# Altium PCB SGK_DVR_01.PcbDoc (part 6 of 7)
Units mil, origin at the board's own origin, x right, y up, seen from the top; angles counter-clockwise.
Board outline 3070.87 x 2598.47 mil, 6 copper layers (Top, L2 GND, l3 POWER, L4 SIG, L5 GND, Bottom), stack 58.1 mil thick; 475 components, 339 nets, 1964 pads, 1036 vias.
Unrouted connection lines stored in the file: 522.
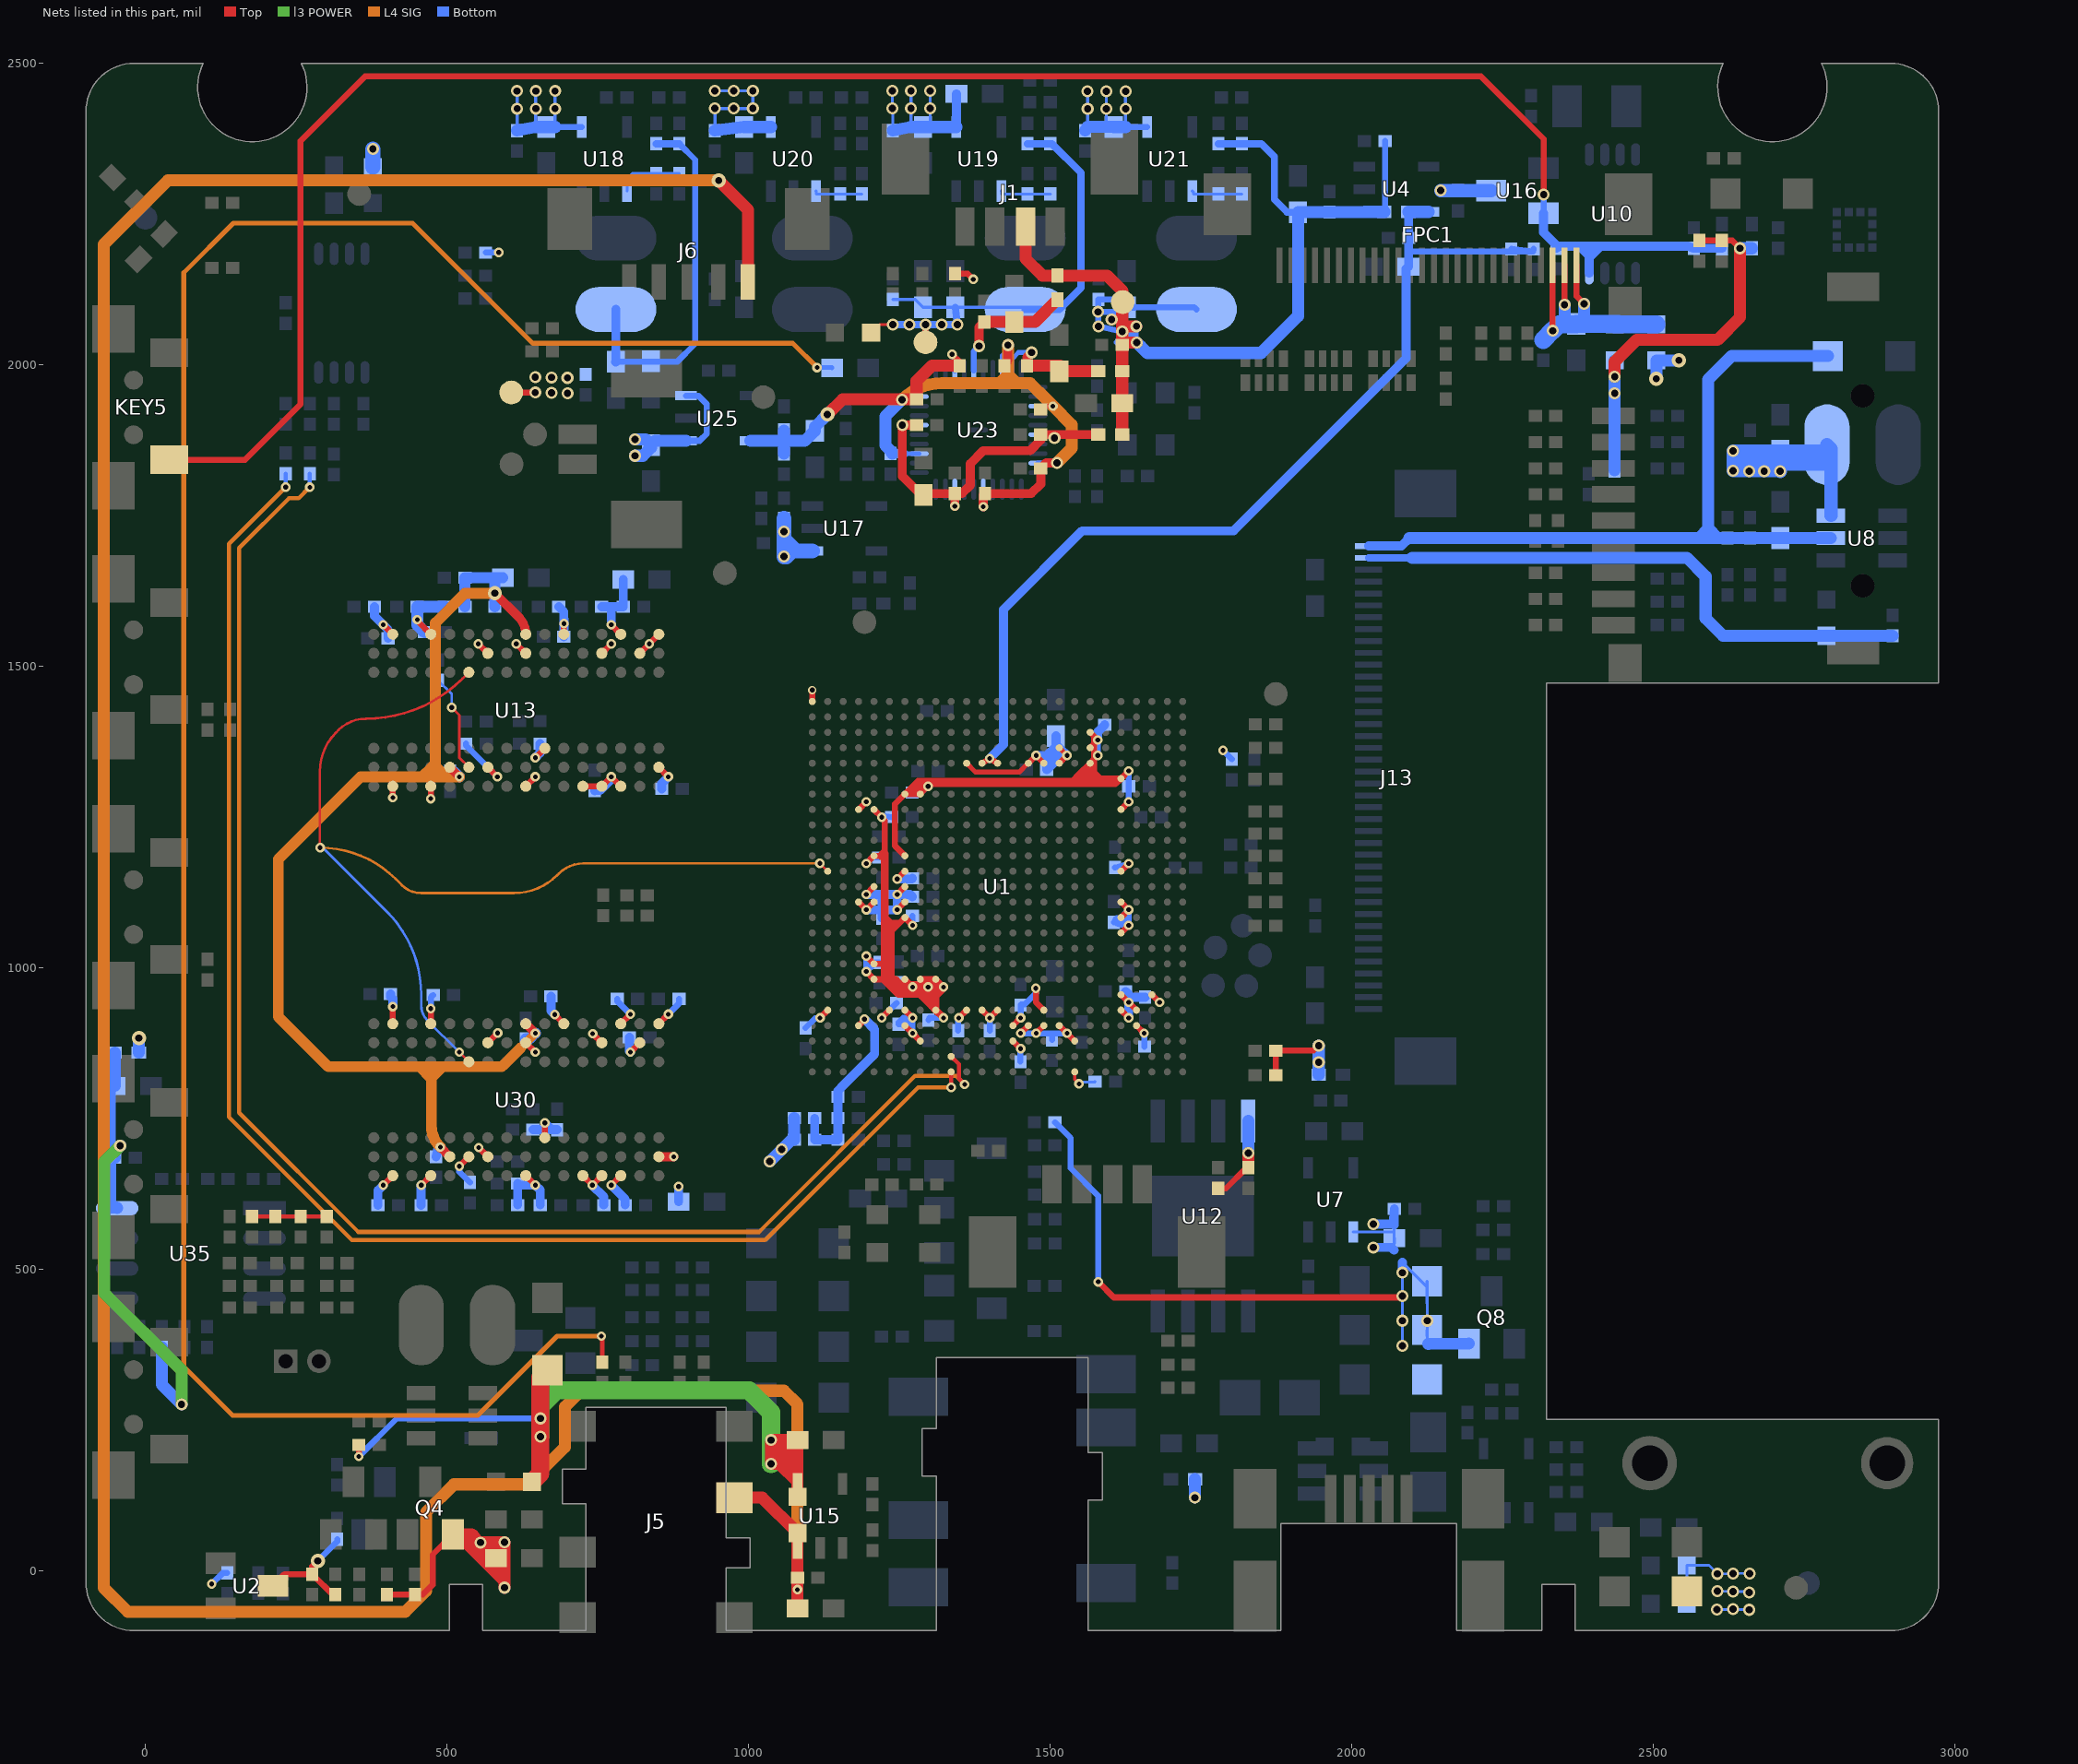
[diagram p8: the nets of this part, all layers, seen from the top]

## Via types
v1: diameter 15.75, hole 7.87, Top to Bottom, 800 vias
v2: diameter 20, hole 12, Top to Bottom, 204 vias
v3: diameter 23.62, hole 11.81, Top to Bottom, 31 vias
v4: diameter 14, hole 8, Top to Bottom, 1 vias

## Nets (pads, with @x,y where several pads share a name; then routed paths per layer and width w, separated by ;. In a path a pad name is that pad's centre, name@x,y a point inside that pad or via, vN(x,y) a via of type N, cw(c..) or ccw(c..) an arc to the next point about the centre after c; other vN are vias at no path point) (continued)
VBUS: C76.2 C88.2 C98.2 C99.1 C133.2 C135.2 C152.2 C158.1 C159.1 C164.1 C165.1 C170.1 C171.1 C174.1 C175.1 C194.1 D6.2 D7.2 D8.2 D14.2 FB8.2 L1.2 L3.2 Q4.2 Q8.2 R37.1 R111.2 R116.1 R129.1 R138.1 U7.1 U8.6 U16.3 U18.4 U19.4 U20.4 U21.4 | length 4583.7
  Top w10: R111.2@400.53,-38.94 C135.2@446.68,-38.94 459.64,-38.94 476.33,-22.25 476.33,27.87 Q4.2@509.61,61.15 ; v1(1579.34,479.79) 1605.14,453.99 2083.55,453.99 v2(2083.55,456.18)
  Top w20: Q4.2@509.61,61.15 Q4.2@517.3,61.15 ; v2@553.96,48.42 554.64,47.56 555.37,46.63 555.59,46.36 C133.2@564.37,35.28 ; C133.2@580.74,21.63 C133.2@579.78,22.63 ; v2(595.19,-27.23) 595.19,-16.74 ; Q4.2@517.3,61.15 529.05,61.15 ; Q4.2@517.3,61.15 595.19,-16.74 ; 529.05,61.15 543.92,46.28 ; 529.05,61.15 541.22,61.15 551.84,48.42 552.56,47.56 553.33,46.63 553.56,46.36 562.8,35.28 566.3,31.08 567.22,29.98 573.35,22.63 574.18,21.63 573.46,22.63 568.18,29.98 567.39,31.08 C133.2@564.37,35.28 ; 543.92,46.28 545.54,47.91 v2(595.19,47.91) ; 543.92,46.28 595.19,-4.99 595.19,-16.74 ; v2(555.55,47.56) 556.45,46.63 v2@556.71,46.36 ; v2(555.55,47.56) 556.21,46.63 556.41,46.36 C133.2@564.37,35.28 ; v2(555.55,47.56) 556.25,46.63 556.46,46.36 564.85,35.28 568.03,31.08 568.87,29.98 C133.2@574.44,22.63 ; v2(555.55,47.56) 556.43,46.63 v2@556.7,46.36 ; v2@556.71,46.36 567.48,35.28 571.56,31.08 572.63,29.98 C133.2@574.89,27.65 ; v2@556.7,46.36 567.29,35.28 571.31,31.08 572.37,29.98 579.4,22.63 580.36,21.63 C133.2@579.78,22.63 ; C133.2@564.37,35.28 567.7,31.08 568.57,29.98 C133.2@574.4,22.63 ; C133.2@574.4,22.63 575.19,21.63 C133.2@574.44,22.63 ; C133.2@574.89,27.65 C133.2@579.78,22.63 ; C133.2@574.89,27.65 v2(595.19,47.91) ; 595.19,-16.74 v2(595.19,47.91)
  Bottom w4.2: R129.1@2555.13,-54.26 R138.1@2555.13,9.67 2591.83,9.67 v2(2605.77,-4.27) 2630.88,-4.27 v2(2631.48,-3.67) 2658.54,-3.67 v2(2659.02,-4.15) ; v2(2604.95,-63.6) v2@2630.92,-63.6 ; v2(2605.77,-33.22) 2630.98,-33.22 v2(2631.66,-33.9) 2656.9,-33.9 v2(2658.31,-35.31) ; v2(2631.66,-62.85) v2@2630.92,-63.6 ; v2(2658.31,-63.96) 2657.95,-63.6 v2@2630.92,-63.6
  Bottom w5: C159.1@615.94,2388.57 616.17,2394.84 v2(616.17,2425.01) 616.17,2454.13 v2(616.04,2454.26) ; 647.01,2394.59 v2(647.01,2425.01) v2(647.01,2454.26) ; C158.1@679.01,2394.59 v2(679.01,2425.01) v2(679.01,2454.26) ; v2(943.93,2454.5) v2(974.9,2454.5) v2(1006.9,2454.5) v2(1006.9,2425.25) v2(974.9,2425.25) v2(944.06,2425.25) 944.06,2394.59 C171.1@944.06,2388.57 ; v2(1238,2454.79) 1238.13,2454.66 v2(1238.13,2425.54) 1238.95,2424.72 C165.1@1238.95,2388.57 ; 1268.97,2394.59 v2(1268.97,2425.54) v2(1268.97,2454.79) ; C164.1@1300.97,2394.59 v2(1300.97,2425.54) v2(1300.97,2454.79) ; v2(1561.74,2453.98) 1561.87,2453.85 v2(1561.87,2424.73) C175.1@1561.87,2394.75 ; C174.1@1592.71,2394.64 v2(1592.71,2424.73) v2(1592.71,2453.98) ; 1624.71,2394.59 v2(1624.71,2424.73) v2(1624.71,2453.98) ; U7.1@2002.29,562.55 C88.2@2069.94,562.55 ; 2069.94,574.19 C88.2@2069.94,562.55 ; C88.2@2070.43,552.14 2069.94,532.39 C88.2@2069.94,562.55 ; v2(2083.55,373.61) v2(2083.55,415.36) v2(2083.55,456.18) v2(2083.55,494.99) ; 2083.55,512.28 D7.2@2124.42,471.42 ; D6.2@2124.36,399.86 D6.2@2124.77,377.01 ; D6.2@2126.81,377.01 D6.2@2124.77,377.01 ; D7.2@2124.42,471.42 2124.77,471.07 2124.42,479.45 D7.2@2124.36,480.86 D7.2@2124.42,471.42 ; D7.2@2124.42,471.42 v2(2124.77,415.36) D6.2@2124.77,377.01
  Bottom w10: C158.1@679.01,2394.59 U18.4@723.3,2394.59 ; R116.1@1507.52,744.33 1533.55,718.3 1533.55,668.36 1579.6,622.31 1579.6,480.06 v1(1579.34,479.79) ; 1624.71,2394.59 U21.4@1660.68,2394.59
  Bottom w15: U19.4@1343.95,2394.59 1344.34,2394.98 C194.1@1344.34,2449.45 ; v2(2035.6,536.82) 2065.51,536.82 2069.94,532.39 ; v2(2035.6,575.63) 2068.51,575.63 C76.2@2070.26,600.61 2069.94,574.19 ; v2(2083.55,494.99) 2083.55,512.28
  Bottom w20: C159.1@615.94,2388.57 647.01,2394.59 C158.1@664.63,2394.59 C158.1@679.01,2394.59 ; C171.1@944.06,2388.57 C170.1@992.35,2394.59 U20.4@1036.89,2394.59 ; C165.1@1238.95,2388.57 1268.97,2394.59 C164.1@1288.74,2394.59 1300.97,2394.59 U19.4@1343.95,2394.59 ; C175.1@1557.87,2388.57 1561.87,2394.75 1592.71,2394.64 C174.1@1604.98,2394.59 1624.71,2394.59 ; v2(1739.68,121.9) L3.2@1739.88,152.34 ; D6.2@2126.81,377.01 Q8.2@2193.93,377.28 ; v3(2504.55,1977.2) R37.1@2504.55,2007.55 v3(2541.97,2007.55)
  Bottom w22: v2(2147.07,2289.22) C152.2@2175.67,2289.22 U16.3@2230.55,2289.22 ; C99.1@2659.8,1857.5 2679.36,1857.5 ; U8.6@2794.07,1750.42 L1.2@2794.07,1835.71 ; 2631.79,1842.38 v2(2631.79,1824.58) 2709,1824.58 v2(2709.83,1823.75) 2709.83,1835.71 ; 2631.79,1842.38 C98.2@2709.68,1842.38 ; 2631.79,1842.38 v2(2631.79,1857.5) 2679.36,1857.5 ; 2679.36,1857.5 C98.2@2709.83,1857.5 ; C98.2@2709.68,1842.38 2709.83,1842.23 2709.83,1835.71 ; C98.2@2709.68,1842.38 2709.83,1842.38 C98.2@2709.83,1857.5 ; 2709.83,1835.71 2787.45,1835.71 L1.2@2794.07,1835.71 ; C98.2@2709.83,1857.5 2782.74,1857.5 2787.45,1862.2 L1.2@2787.45,1867.83 2794.07,1861.2 L1.2@2794.07,1835.71
  Bottom w25: v2(377.05,2357.97) 377.22,2357.8 FB8.2@377.22,2328.17
  other v2: 2658.5,1823.75 2683.25,1823.75
VCC_5V: C134.2 D2.2 R105.1 R110.2 R117.2 U15.5 | length 1438.7
  Top w10: v1(353.72,190.15) R110.2@353.72,209.25
  Top w20: R117.2@1080.88,123.3 U15.5@1080.88,144.72 U15.5@1080.88,148.47 ; v2@1037.06,187.36 v2(1037.06,177.85) 1051.51,177.85 ; v2@1037.06,187.36 1037.06,200.51 ; v2@1037.06,187.36 1080.88,187.36 ; 1037.06,200.51 v2(1037.06,217.46) C134.2@1079.31,217.46 ; 1037.06,200.51 1080.88,200.51 ; 1051.51,177.85 1080.88,177.85 ; 1051.51,177.85 U15.5@1080.88,148.47 ; C134.2@1079.31,217.46 C134.2@1080.69,217.46 1080.88,217.27 C134.2@1080.88,215.89 ; C134.2@1079.31,217.46 C134.2@1080.88,215.89 ; U15.5@1080.88,148.47 1080.88,177.85 ; 1080.88,177.85 1080.88,187.36 ; 1080.88,187.36 1080.88,200.51 ; 1080.88,200.51 C134.2@1080.88,215.89
  Top w30: R105.1@640.87,148.15 654.63,161.91 v2(654.63,223.26) v2(654.63,253.28) 654.63,321.29 D2.2@666.43,333.08
  l3 POWER w30: v2(654.63,223.26) v2(654.63,253.28) 654.63,273.79 680.69,299.84 1000.47,299.84 1037.06,263.26 v2(1037.06,217.46) v2(1037.06,177.85)
  Bottom w10: v1(353.72,190.15) 416.85,253.28 v2(654.63,253.28)
VCC_CAM: C138.2 C139.2 J5.2 J6.1 R117.1 U15.1 | length 5483
  Top w20: v3(950.44,2305.8) 998.65,2257.59 J6.1@998.65,2137.8 ; J5.2@976.38,122.05 1022.43,122.05 1080.88,63.6 R117.1@1080.88,63.3 U15.1@1080.88,38.42 C139.2@1080.88,-11.06 v1(1080.88,-30.47) C138.2@1080.88,-61.56
  L4 SIG w20: v3(950.44,2305.8) 950.13,2306.11 37.12,2306.11 -68.81,2200.18 -68.81,-27.82 -29.25,-67.38 430.58,-67.38 465.16,-32.8 465.16,97.74 511.38,143.95 633.51,143.95 695.35,205.79 695.35,272.4 722.1,299.15 1058.48,299.15 1080.88,276.75 v1(1080.88,-30.47)
VCC_RTC: C115.1 C145.2 FB11.1 KEY5.1 U10.8 U16.2 | length 3402
  Top w10: KEY5.1@39.37,1842.91 165.15,1842.91 257.16,1934.93 257.16,2371.44 364.36,2478.63 2213.7,2478.63 2317.79,2374.54 v2(2317.79,2282.64)
  Bottom w10: U16.2@2317.55,2251.72 2317.79,2251.96 v2(2317.79,2282.64) ; C115.1@2338.87,2193.49 C115.1@2338.87,2198.7
  Bottom w15: U16.2@2317.55,2251.72 2317.55,2220.02 C115.1@2338.87,2198.7 ; C115.1@2338.87,2193.49 2340.06,2194.68 2340.06,2197.12 2377.17,2197.12 ; U10.8@2393.42,2152.14 2393.42,2180.87 ; FB11.1@2613.12,2193.49 C145.2@2566.59,2193.49 2556.05,2197.12 2412.4,2197.12 ; 2377.17,2197.12 2393.42,2197.12 ; 2377.17,2197.12 2393.42,2180.87 ; 2393.42,2180.87 2396.15,2180.87 2412.4,2197.12 ; 2393.42,2180.87 2393.42,2197.12 ; 2393.42,2197.12 2412.4,2197.12
VCC_SENSOR: C71.2 C72.2 FPC1.1 FPC1.2 FPC1.3 R30.2 R37.2 | length 514
  Top w10: v2(2332.68,2056.73) 2332.68,2100.09 FPC1.3@2332.68,2165.35 ; v2(2352.36,2100.09) FPC1.2@2352.36,2165.35 ; FPC1.1@2372.05,2165.35 2372.05,2114.17 v2(2384.6,2101.62)
  Bottom w20: 2352.36,2067.53 v2(2352.36,2100.09) ; C72.2@2384.6,2067.97 v2(2384.6,2101.62)
  Bottom w30: C71.2@2317.16,2041.58 v2@2332.31,2056.73 ; v2(2332.68,2056.73) v2@2332.31,2056.73 ; R30.2@2435.52,2067.55 R30.2@2441.65,2067.55 ; R37.2@2504.55,2067.55 2490.58,2067.55 R30.2@2441.65,2067.55 ; v2@2332.31,2056.73 2332.68,2057.1 2343.11,2067.53 2352.36,2067.53 2371.32,2067.53 C72.2@2371.76,2067.97 2384.6,2067.97 2435.52,2067.97 2441.23,2067.97 R30.2@2441.65,2067.55
VCCA: C132.2 C137.2 FB4.2 R101.1 U35.8 | length 909.8
  l3 POWER w20: v2(-41.94,705.26) -68.42,678.79 -68.42,461.62 59.81,333.39 v2(59.81,276.55)
  Bottom w20: C137.2@-50.93,685.71 C137.2@-58.29,687.92 ; FB4.2@-50.93,859.73 C132.2@-50.93,804.64 -58.9,804.64 -58.9,688.11 -58.29,688.11 C137.2@-58.29,687.92 ; U35.8@-46.84,601.99 -47.88,603.03 -58.29,603.03 C137.2@-58.29,687.92 ; v2(-41.94,705.26) -50.93,695.73 C137.2@-58.29,687.92 ; R101.1@26.93,371.3 26.93,309.43 v2(59.81,276.55)
VDD11: C18.2 C19.2 C20.2 C21.2 C22.2 C23.2 C24.2 C25.2 C26.2 C27.2 C57.2 C161.1 C162.1 C163.1 C195.1 L10.2 R146.2 R187.1 TP1.1 U1.AA8 U1.AA11 U1.AA18 U1.AA19 U1.D21 U1.E20 U1.E21 U1.J4 U1.J5 U1.K5 U1.K21 U1.L5 U1.M22 U1.R5 U1.U19 U1.U21 U1.V19 U1.W15 U1.W19 | length 2767
  Top w4.4: R146.2@1202.96,2053.45 1216.53,2067.02 v2(1238.88,2067.02)
  Top w5: 1279.75,968.67 1279.75,968.01 1290.29,957.47
  Top w8: U1.R5@1361.25,1339.73 1376.04,1324.94 1448.5,1324.94 1463.29,1339.73 U1.L5@1463.61,1339.73 ; U1.J4@1514.79,1365.33 v1(1527.58,1352.53)
  Top w10: v1(1194.91,994.26) U1.AA19@1207.71,981.47 1225.53,981.47 1225.78,981.47 1231.76,987.45 ; v1(1194.91,1019.85) U1.AA18@1207.71,1007.06 1225.53,1007.06 1231.76,1007.06 ; v1(1194.91,1173.39) U1.AA11@1207.71,1186.19 1216.79,1186.19 ; U1.AA8@1207.71,1262.96 v1(1220.5,1250.17) 1225.53,1245.14 1225.53,1194.93 ; 1225.53,1085.44 1233.17,1077.8 1235.76,1075.21 ; 1225.53,1178.28 1217.62,1186.19 ; 1225.53,1186.19 1217.62,1186.19 ; 1225.53,1189.45 1225.53,1194.93 ; 1228.12,1075.21 1235.76,1075.21 ; 1231.76,1057.98 1233.03,1057.98 1246.62,1071.57 1250.26,1075.21 ; U1.W19@1258.89,981.47 v1(1271.68,968.67) ; v1(1271.68,1071.03) U1.W15@1258.89,1083.83 1250.26,1075.21 ; v2(1292.94,2067.02) 1293.06,2066.9 1293.06,2037.87 TP1.1@1293.06,2037.62 ; v1(1297.27,968.67) U1.V19@1284.48,981.47 1300.75,981.47 ; 1310.06,968.67 1310.06,972.16 1300.75,981.47 ; v1(1322.86,968.67) U1.U19@1310.07,981.47 1300.75,981.47 ; U1.M22@1438.02,904.69 v1(1450.81,917.49) ; U1.L5@1463.61,1339.73 v1(1476.4,1352.53) U1.K5@1489.2,1339.73 ; v1(1475.95,966.63) 1475.95,943.53 U1.K21@1489.2,930.29 ; U1.J5@1514.79,1339.73 v1(1527.58,1352.53) ; U1.E21@1617.15,930.29 v1(1629.94,917.49) ; U1.E20@1617.15,955.88 v1(1629.94,943.08) U1.D21@1642.74,930.29 ; 1216.79,1186.19 1217.62,1186.19 ; 1216.79,1186.19 1217.26,1186.66 ; 1217.26,1186.66 1217.26,1186.55 1217.62,1186.19 ; 1217.26,1186.66 1220.05,1189.45 1225.53,1194.93 ; 1235.76,1075.21 1250.26,1075.21
  Top w12: v1@1272.65,968.67 1272.65,967.7 1282.88,957.47 ; 1310.06,968.67 1310.06,957.47 ; v1(1322.86,917.49) U1.U21@1310.07,930.29 ; v1(1322.86,968.67) 1322.86,966.68 1313.65,957.47 1310.06,953.88 ; 1282.88,957.47 1290.29,957.47 1303.05,957.47 ; 1282.88,957.47 1286.47,953.88 1290.58,949.76 ; 1290.58,949.76 1295.34,949.76 1299.46,953.88 1303.05,957.47 ; 1290.58,949.76 1303.05,937.3 ; 1303.05,937.3 1303.05,949.76 1303.05,953.88 1303.05,957.47 ; 1303.05,937.3 U1.U21@1310.07,930.29 ; 1303.05,957.47 1310.06,957.47 ; U1.U21@1310.07,930.29 1310.07,937.3 1310.06,949.76 1310.06,953.88 ; 1310.06,953.88 1310.06,957.47
  Top w13: 1225.53,1189.45 1225.53,1186.66 1225.53,1186.19 1225.53,1178.28 1225.53,1085.44 1225.53,1077.8 ; 1231.76,1071.57 1228.12,1075.21 1225.53,1077.8 ; 1242.01,977.2 1237.74,981.47 1231.76,987.45 1225.53,993.68 ; 1282.88,957.47 1248.37,957.47 1228.64,977.2 1225.53,980.31 1225.53,981.47 1225.53,987.45 1225.53,993.68 ; 1225.53,993.68 1225.53,1007.06 1225.53,1057.98 1225.53,1071.57 1225.53,1075.21 1225.53,1077.8
  Top w15: v1(1297.27,968.67) 1310.06,968.67 v1(1322.86,968.67)
  Top w20: 1231.76,987.45 1231.76,993.68 1231.76,1007.06 1231.76,1057.98 1231.76,1071.57 ; 1242.01,977.2 1250.53,968.67 v1(1271.68,968.67) 1272.65,968.67 1279.75,968.67 v1(1297.27,968.67)
  Bottom w5: C162.1@1238.95,2108.6 1275.8,2108.6 C195.1@1288.74,2095.66 C163.1@1342.52,2095.66 1454.81,2095.66 L10.2@1458.29,2092.18
  Bottom w10: v1(1194.91,1019.85) v1@1196.1,1018.66 ; v1(1194.91,1173.39) 1205.04,1183.53 C25.2@1215.33,1183.53 ; C57.2@1216.54,1009.34 C57.2@1209.99,1009.34 ; v1(1220.5,1250.17) 1222.44,1252.11 C23.2@1236.98,1250.38 ; C27.2@1247.22,976.17 1254.72,968.67 v1(1271.68,968.67) ; C24.2@1271.42,1086.56 1271.42,1071.29 v1(1271.68,1071.03) ; C26.2@1297.82,913.91 1299.41,915.5 1299.41,917.49 v1(1322.86,917.49) ; v1(1450.81,917.49) v1(1450.81,917.49) C19.2@1450.75,938.61 1451.97,939.83 1457.53,939.83 1475.95,958.24 v1(1475.95,966.63) ; v1@1196.1,1018.66 1194.91,1017.47 v1(1194.91,994.26) 1205.85,1005.21 C57.2@1207.92,1007.27 ; v1@1196.1,1018.66 1205.41,1009.34 1205.85,1009.34 ; 1205.85,1009.34 C57.2@1207.92,1007.27 ; 1205.85,1009.34 1207.92,1009.34 C57.2@1209.99,1009.34 ; C57.2@1207.92,1007.27 C57.2@1209.99,1009.34
  Bottom w12: v2(1238.88,2067.02) 1264.04,2067.02 v2(1266.35,2067.02) ; C163.1@1342.52,2095.66 v2(1345.72,2067) 1342.52,2067 v2(1319.84,2067) v2(1292.94,2067.02) ; L10.2@1458.29,2092.18 1515.05,2092.18 1519.42,2096.55 1550.72,2127.85 1550.72,2318.66 1502.64,2366.74 R187.1@1499.96,2366.74 C161.1@1461.88,2366.74 ; v2(1266.35,2067.02) v2@1288.74,2067.02 ; v2(1266.35,2067.02) v2@1288.74,2067.04 ; v2@1288.74,2067.02 1291.22,2067.02 v2(1292.94,2067.02) ; v2@1288.74,2067.04 1291.22,2067.04 v2(1292.94,2067.02)
  Bottom w15: v1(1476.4,1352.53) 1494.11,1352.53 ; C18.2@1509.31,1384.92 1509.39,1384.84 C18.2@1509.39,1370.72 ; C22.2@1624.99,961.32 1629.94,956.36 1629.94,954.48 1632.26,952.16 C22.2@1632.26,951.78 ; v1(1629.94,917.49) v1(1629.94,943.08) 1629.94,951.78 C22.2@1632.26,951.78 ; C21.2@1657.08,951.78 C22.2@1632.26,951.78 ; 1494.11,1352.53 1509.39,1367.81 C18.2@1509.39,1370.72 ; 1494.11,1352.53 C20.2@1494.11,1328.93 1509.39,1344.21 1516.99,1351.82 1516.99,1352.53 ; 1494.11,1352.53 1509.39,1352.53 1516.99,1352.53 ; C18.2@1509.39,1370.72 1516.99,1363.12 v1(1527.58,1352.53) 1516.99,1352.53
VDD11_EN: C184.2 R142.2 U19.1 | length 85.8
  Bottom w5: U19.1@1418.75,2288.29 1419.23,2287.81 1419.23,2283.46 C184.2@1461.88,2283.46 R142.2@1499.96,2283.46
VDD11ARM_EN: C186.2 R180.2 U20.1 | length 80.9
  Bottom w5: U20.1@1111.69,2288.29 1111.87,2288.29 1111.87,2283.46 C186.2@1151.42,2283.46 R180.2@1187.72,2283.46
VDD12: C45.2 C46.2 C47.2 C48.2 C50.2 C53.2 C54.2 C67.1 C69.1 FB13.1 U23.3 U23.8 U23.13 U23.19 U23.25 U23.33 U23.39 U25.5 | length 1964.2
  Top w8: C53.2@1484.08,1926.16 1489.66,1931.74 v1(1504.41,1931.74)
  Top w10: v1(1337.12,2017.56) 1349.59,2005.09 C46.2@1349.59,1998.62
  Top w15: v2(1254.14,1942.51) 1256.84,1942.56 C67.1@1278.28,1942.99 ; v1(1388.88,1764.85) 1388.88,1783.98 C50.2@1391.77,1786.88 1468.41,1786.88 1484.08,1802.55 C48.2@1484.08,1828.54 1484.08,1828.67 1492.94,1837.52 v2(1510.92,1837.52) ; C47.2@1423.73,1998.62 1429.7,2007.8 v2(1429.7,2032.89)
  Top w20: v3(1130.5,1917.99) 1155.49,1942.99 C67.1@1278.28,1942.99 1278.28,1973.26 1303.65,1998.62 C46.2@1349.59,1998.62
  L4 SIG w20: v2(1429.7,2032.89) 1429.7,1983.64 ; v1(1504.41,1931.74) 1493.64,1942.51 ; v2(1510.92,1837.52) 1535.27,1861.88 1535.27,1900.98 1504.41,1931.85 1493.75,1942.51 1493.64,1942.51 ; v2(1254.14,1942.51) cw(c1320.28,1876.37) 1320.28,1969.9 ; v2(1254.14,1942.51) cw(c1320.28,1876.37) 1320.28,1969.9 ; v2(1254.14,1942.51) cw(c1320.28,1876.37) 1320.28,1969.9 ; v2(1254.14,1942.51) cw(c1320.28,1876.37) 1320.28,1969.9 ; v2(1254.14,1942.51) cw(c1320.28,1876.37) 1320.28,1969.9 ; v2(1254.14,1942.51) cw(c1320.28,1876.37) 1320.28,1969.9 ; 1320.28,1969.9 1413.71,1969.9 1415.96,1969.9 ; 1415.96,1969.9 1429.7,1969.9 ; 1415.96,1969.9 1429.7,1983.64 ; 1429.7,1969.9 1429.7,1983.64 ; 1429.7,1969.9 1444.17,1969.9 ; 1429.7,1983.64 1430.43,1983.64 1444.17,1969.9 ; 1444.17,1969.9 1446.55,1969.9 1466.24,1969.9 1493.64,1942.51
  Bottom w8: v2(1254.14,1942.51) 1259.29,1947.65 1259.29,1947.49 U23.39@1282.58,1947.49 ; 1257.36,1853.08 U23.33@1282.58,1853 ; v1(1388.88,1764.85) U23.25@1388.88,1793.95 ; U23.8@1420.37,1990.8 1420.37,2015.58 1429.7,2024.91 v2(1429.7,2032.89) ; U23.19@1479.43,1837.25 v2(1510.92,1837.52) ; U23.13@1479.43,1931.74 v1(1504.41,1931.74)
  Bottom w10: v1(1337.12,2017.56) 1341.63,2013.05 U23.3@1341.63,1990.8
  Bottom w15: C54.2@1235.22,1853 1238.18,1853.01 1257.36,1853.08
  Bottom w20: U25.5@1002.45,1874.3 1058.36,1874.3 ; C45.2@1058.36,1852.66 1058.36,1874.3 ; FB13.1@1058.36,1891.31 1058.36,1874.3 ; v3(1130.5,1917.99) 1109.73,1897.22 C69.1@1109.73,1890.57 1109.48,1890.81 1092.97,1874.3 1058.36,1874.3 ; C54.2@1238.18,1853.01 1238.18,1854.94 1226.69,1866.43 1226.69,1915.05 v2(1254.14,1942.51)
VDD15: C11.2 C12.2 C13.2 C14.2 C15.2 C16.2 C17.2 C40.1 C58.2 C125.2 C126.2 C141.2 C142.2 C144.2 C146.2 C148.2 C150.2 C153.2 C155.1 C156.1 C157.1 C178.2 C179.2 C180.2 C196.2 C197.2 C198.2 C199.2 C271.2 C272.2 C273.2 C274.2 C275.2 C276.2 C284.2 C285.2 L9.2 R10.2 R46.2 R48.2 R51.2 R53.2 R97.2 R188.1 TP2.1 U1.AA13 U1.AA14 U1.AB8 U1.AB14 U1.AD21 U1.AE1 U1.W12 U1.W13 U1.W14 U1.Y21 U13.A1 U13.A8 U13.B2 U13.C1 U13.C9 U13.D2 U13.D9 U13.E9 U13.F1 U13.G7 U13.H2 U13.H9 U13.K2 U13.K8 U13.N1 U13.N9 U13.R1 U13.R9 U30.A1 U30.A8 U30.B2 U30.C1 U30.C9 U30.D2 U30.D9 U30.E9 U30.F1 U30.G7 U30.H2 U30.H9 U30.K2 U30.K8 U30.N1 U30.N9 U30.R1 U30.R9 | length 3032.7
  Top w10: v1(394.31,640.05) U30.R9@410.06,655.8 ; v1(394.31,1569.18) U13.R1@410.06,1553.44 ; U30.R1@410.06,907.77 v1(410.06,936.19) ; v1(410.06,1282.53) U13.R9@410.06,1301.47 ; v1(450.55,1577.69) 450.55,1575.94 U13.N1@473.05,1553.44 ; v1(457.3,640.05) U30.N9@473.05,655.8 ; U30.N1@473.05,907.77 v1(473.05,932.87) ; v1(473.05,1280.92) U13.N9@473.05,1301.47 ; v1(551.79,1537.69) U13.K2@567.54,1521.94 ; v1(552.42,702.42) U30.K8@567.54,687.29 ; U30.K2@567.54,876.27 v1(583.91,892.35) ; U13.K8@567.54,1332.96 v1(583.29,1317.22) ; TP2.1@606.42,1954.43 646,1954.43 v2(646.15,1954.28) ; v1(614.78,1537.69) U13.H2@630.53,1521.94 ; U30.H9@630.53,655.8 v1(646.28,640.05) ; U30.H2@630.53,876.27 v1(646.28,860.52) ; U13.H9@630.53,1301.47 v1(646.28,1317.22) ; v1(646.28,1348.71) U13.G7@662.03,1364.46 ; U30.G7@662.03,718.79 v1(662.03,743.34) ; v1(678.4,922.89) U30.F1@693.52,907.77 ; U13.F1@693.52,1553.44 693.52,1562.43 v1(693.84,1571.2) ; U30.E9@725.02,655.8 v1(740.77,640.05) U30.D9@756.51,655.8 ; U13.E9@725.02,1301.47 U13.D9@756.51,1301.47 v1(772.26,1317.22) U13.C9@788.01,1301.47 ; v1(741.39,891.39) U30.D2@756.51,876.27 ; U13.D2@756.51,1521.94 v1(772.26,1537.69) ; v1(772.26,640.05) U30.C9@788.01,655.8 ; v1(772.26,1569.18) U13.C1@788.01,1553.44 ; U30.C1@788.01,907.77 v1(803.76,923.52) ; v1(803.76,860.52) U30.B2@819.51,876.27 ; U13.B2@819.51,1521.94 v1(835.25,1537.69) U13.A1@851,1553.44 ; U30.A1@851,907.77 v1(866.75,923.52) ; U13.A8@851,1332.96 v1(866.75,1317.22) ; U1.AE1@1105.34,1442.1 v4(1105.34,1461.01) ; v1(1118.29,917.48) U1.AD21@1130.93,930.29 ; U1.AB14@1182.11,1109.42 v1(1194.91,1096.62) U1.AA14@1207.71,1109.42 ; U1.AB8@1182.11,1262.96 v1(1194.91,1275.76) ; v1(1194.91,1122.21) U1.AA13@1207.71,1135.01 ; v1(1220.5,917.49) U1.Y21@1233.3,930.29 ; v1(1246.09,1096.62) U1.W14@1258.89,1109.42 ; v1(1246.09,1122.21) U1.W13@1258.89,1135.01 ; v1(1246.09,1147.8) U1.W12@1258.89,1160.6
  Top w15: U30.A8@851,687.29 v1(875.89,687.3)
  Bottom w10: v1(473.05,932.87) 473.05,951.47 C146.2@476.87,955.29 ; R51.2@531.08,1372.08 531.08,1369.42 v1(583.29,1317.22) ; C157.1@779.59,2005.13 779.93,2005.13 838.18,2005.13 850.68,2005.13 881.25,2005.13 911.41,2035.29 911.41,2340.32 R188.1@884.99,2366.74 ; C150.2@781.84,948.97 781.84,945.43 v1(803.76,923.52) ; v1(866.75,923.52) 884.35,941.12 C148.2@884.35,948.97 ; C12.2@1094.14,900.68 1110.32,916.87 1118.29,916.87 v1(1118.29,917.48) ; v1(1220.5,917.49) C199.2@1245.07,942.06
  Bottom w12: C155.1@846.97,2366.74 R188.1@884.99,2366.74
  Bottom w15: C142.2@379.7,1598.93 379.7,1583.8 v1(394.31,1569.18) 402.1,1561.39 C58.2@402.1,1546.74 ; C274.2@385.44,607.03 385.44,631.18 v1(394.31,640.05) ; C276.2@406.3,956.87 406.3,952.37 410.06,948.61 v1(410.06,936.19) ; v1@450.52,1575.88 v1(450.55,1577.69) ; C273.2@456.89,607.03 456.89,639.64 v1(457.3,640.05) ; C272.2@616.99,607.15 616.99,642.92 R48.2@617.05,642.98 619.98,640.05 v1(646.28,640.05) 654.44,631.89 C271.2@654.44,607.15 ; R53.2@642.46,732.02 662.03,732.02 C144.2@673.35,732.02 ; v1(646.28,1348.71) 654.07,1356.51 R97.2@654.07,1372.08 ; v1(662.03,743.34) C144.2@673.35,732.02 ; C14.2@672.33,952.96 672.33,928.96 v1(678.4,922.89) ; C144.2@682.2,732.02 C144.2@673.35,732.02 ; C178.2@685.33,1598.93 693.52,1590.74 v1(693.84,1571.2) C153.2@693.57,1549.32 ; v1(740.77,640.05) 759.7,621.12 C15.2@759.7,607.15 ; C17.2@744.72,1294.07 745.04,1294.39 753.71,1294.39 772.26,1312.94 v1(772.26,1317.22) ; C141.2@756.4,1598.93 772.26,1598.93 ; v1(772.26,640.05) 795.2,617.11 C16.2@795.2,607.15 ; v1(772.26,1569.18) 772.26,1598.93 ; C157.1@779.51,2005.04 C157.1@779.59,2005.13 ; C157.1@779.93,2005.13 L9.2@779.93,2092.18 ; C284.2@792.05,1644.31 C13.2@792.05,1598.93 772.26,1598.93 ; C275.2@802.23,885.32 802.23,862.05 v1(803.76,860.52) ; C126.2@855.94,1297.18 855.94,1306.41 v1(866.75,1317.22) ; C285.2@883.73,612.47 v1(883.76,637.93) ; v1(1194.91,1096.62) 1221.13,1096.62 ; v1(1194.91,1122.21) 1221.13,1122.21 v1(1246.09,1122.21) ; C196.2@1221.13,1082.8 1221.13,1096.62 ; C197.2@1221.13,1116.43 1221.13,1096.62 ; v1(1246.09,1147.8) 1270.15,1147.8 C198.2@1271.42,1149.07 ; C179.2@1271.42,1118.42 1267.63,1122.21 v1(1246.09,1122.21) ; 1221.13,1096.62 v1(1246.09,1096.62) v1(1246.09,1122.21)
  Bottom w20: v1@450.52,1575.88 C180.2@450.52,1598.93 ; v1(450.55,1577.69) 450.83,1568.92 C125.2@462.88,1556.87 ; C180.2@450.55,1598.93 R46.2@495.63,1598.93 ; v2(1034.77,679.34) v2(1054.85,699.42) R10.2@1075.41,719.97 ; C40.1@1075.41,751.1 R10.2@1075.41,719.97 ; R10.2@1075.41,719.97 1075.47,720.03 R10.2@1075.47,715.65 1075.41,715.71 R10.2@1075.41,719.97
  other v2: 699.64,1953.18 673.25,1953.97 699.58,1978.65 646.15,1979.82 673.3,1979.33
VDD15_EN: C183.2 R137.2 U18.1 | length 110.9
  Bottom w4.4: U18.1@798.11,2288.29 798.42,2288.6 798.42,2308.93 806.95,2317.46 C183.2@846.97,2317.46
  Bottom w5: C183.2@846.97,2317.46 R137.2@884.99,2317.46
VDD33_EN: C185.2 R179.2 U21.1 | length 85.6
  Bottom w5: U21.1@1735.49,2288.29 1737.45,2286.33 1737.45,2283.46 C185.2@1778.81,2283.46 R179.2@1817.4,2283.46
VDD33_PR2000_D: C89.2 C94.2 C95.2 C96.2 FB12.2 U23.16 U23.28 U23.36 | length 631.5
  Top w15: C94.2@1278.11,1900.27 1254.77,1900.27 v2(1254.66,1900.38) 1254.66,1900.27 1254.66,1815.33 C89.2@1285.28,1784.71 ; C89.2@1289.81,1784.71 C89.2@1285.28,1784.71 ; v1(1341.63,1765.93) 1341.63,1786.77 C96.2@1341.74,1786.88 ; v2(1506.82,1879.14) v2@1501.31,1884.65 ; FB12.2@1579.21,1884.65 v2@1501.31,1884.65 ; C89.2@1285.28,1784.71 1287.46,1786.88 C96.2@1341.74,1786.88 ; C96.2@1341.74,1786.88 1353.4,1786.88 1367.13,1800.61 1367.13,1836.37 1388.66,1857.9 1466.37,1857.9 1484.08,1875.61 C95.2@1484.08,1884.65 v2@1501.31,1884.65
  Bottom w8: v2(1254.66,1900.38) U23.36@1282.58,1900.25 ; v1(1341.63,1765.93) U23.28@1341.63,1793.95 ; U23.16@1479.43,1884.5 1497.61,1884.5 v2(1506.82,1879.14)
VDD33_PR2000_P: C82.2 C91.2 FB6.2 U23.9 | length 210.6
  Top w15: C91.2@1461.12,1998.62 1461.12,2013.07 v2(1468.8,2020.75) ; C82.2@1514.85,1989.56 1514.85,1997.2 C82.2@1516.28,1998.62
  Top w20: C91.2@1461.12,1998.62 C82.2@1516.28,1998.62 ; C82.2@1514.85,1989.56 FB6.2@1579.21,1989.56
  Bottom w8: U23.9@1436.12,1990.8 1436.12,2009.63 1447.24,2020.75 v2(1468.8,2020.75)
VDD33_PR2000_V: C81.2 C90.2 FB5.2 U23.5 | length 224.1
  Top w15: v2(1382.01,2031.4) 1382.01,2062.81 C90.2@1390.61,2071.41
  Top w20: C90.2@1390.61,2071.41 C81.2@1440.48,2071.41 1474.73,2071.41 FB5.2@1511.55,2108.24
  Bottom w10: U23.5@1373.13,1990.8 1373.13,2022.52 v2(1382.01,2031.4)
VDDIO33: C2.2 C3.2 C4.2 C5.2 C6.2 C7.2 C8.2 C9.2 C10.2 C43.2 C56.2 C62.2 C63.2 C73.2 C79.2 C80.2 C121.1 C129.1 C147.2 C169.1 C172.1 C173.1 FB1.1 FB4.1 FB5.1 FB6.1 FB7.1 FB9.1 FB10.1 FB12.1 J1.2 L12.2 R8.2 R9.2 R11.1 R28.1 R30.1 R82.1 R83.1 R85.1 R86.1 R103.1 R104.1 R113.2 R131.1 R149.1 R157.2 TP21.1 U1.C20 U1.D22 U1.E6 U1.E8 U1.E12 U1.E14 U1.E15 U1.E16 U1.G3 U1.G4 U1.G5 U1.H23 U1.J22 U1.K22 U1.L22 U1.M23 U1.N21 U1.P21 U1.R21 U1.V7 U1.V23 U1.W7 U1.W11 U1.W21 U1.W22 U2.3 U4.1 U12.8 U17.1 U25.1 U25.3 | length 5807.1
  Top w10: U2.3@211.52,-23.93 230.71,-4.74 C43.2@276.24,-4.74 ; v3(285.77,17.16) 276.24,7.63 C43.2@276.24,-4.74 ; R113.2@314.69,-38.94 314.69,-38.15 313.07,-36.54 313.07,-41.58 C43.2@276.5,-5 C43.2@276.24,-4.74 ; U1.W22@1258.89,904.69 v1(1271.68,891.9) U1.V23@1284.48,879.1 ; U1.W21@1258.89,930.29 v1(1271.68,917.49) ; U1.W11@1258.89,1186.19 1242.52,1202.55 1242.52,1272.19 1253.16,1282.83 ; R103.1@1342.18,2151.52 1362.86,2151.52 v1(1372.32,2142.06) ; v1(1348.45,917.49) U1.R21@1361.25,930.29 ; U1.P21@1386.84,930.29 v1(1399.63,917.49) U1.N21@1412.43,930.29 ; U1.M23@1438.02,879.1 v1(1450.81,866.31) ; v1(1450.81,891.9) U1.L22@1463.61,904.69 ; v1(1476.4,891.9) U1.K22@1489.2,904.69 ; U1.J22@1514.79,904.69 v1(1527.58,891.9) U1.H23@1540.38,879.1 ; U1.G4@1565.97,1365.33 1572.69,1372.04 ; U1.G3@1565.97,1390.92 1572.69,1384.2 ; v1(1578.76,1352.53) 1572.69,1346.45 ; U1.E16@1617.15,1058.24 v1(1629.94,1071.03) ; U1.E15@1617.15,1083.83 v1(1629.94,1096.62) U1.E14@1617.15,1109.42 ; U1.E12@1617.15,1160.6 v1(1629.94,1173.39) ; U1.E8@1617.15,1262.96 v1(1629.94,1275.76) ; TP21.1@1619.21,2103.48 TP21.1@1619.97,2104.23 ; v1(1629.94,1326.94) U1.E6@1617.15,1314.14 ; U1.D22@1642.74,904.69 v1(1655.54,891.9) ; U1.C20@1668.34,955.88 v1(1681.13,943.08) ; R83.1@1778.14,634.93 1791.03,634.93 1825.03,668.93 C121.1@1828.14,668.93 ; R104.1@1873.56,822.62 R82.1@1873.56,863.11 1873.78,863.33 1936.61,863.33 v2(1944.89,871.61) ; R9.2@2575.7,2206.29 R8.2@2612.98,2206.29 2630.44,2206.29 v2(2643.24,2193.49) ; 1253.16,1282.83 1253.62,1283.28 ; 1253.16,1282.83 1253.62,1283.28 ; 1253.62,1283.28 U1.W7@1258.89,1288.55 ; U1.W7@1258.89,1288.55 U1.V7@1284.48,1288.55 1289.52,1293.6 ; U1.W7@1258.89,1288.55 1263.94,1293.6 ; 1263.94,1293.6 1289.52,1293.6 ; 1263.94,1293.6 1271.68,1301.35 ; 1271.68,1301.35 1280.61,1310.28 1533.47,1310.28 ; 1271.68,1301.35 v1(1297.27,1301.35) ; 1289.52,1293.6 v1(1297.27,1301.35) ; v1(1297.27,1301.35) 1302.47,1305.02 1533.47,1305.02 ; 1533.47,1305.02 1533.47,1307.23 ; 1533.47,1305.02 1608.03,1305.02 U1.E6@1617.15,1314.14 ; 1533.47,1307.23 1533.47,1310.28 ; 1533.47,1307.23 1536.52,1310.28 ; 1533.47,1310.28 1536.52,1310.28 ; 1536.52,1310.28 1547.16,1320.92 ; 1536.52,1310.28 1537.11,1310.28 1540.97,1314.14 1562.48,1314.14 ; 1547.16,1320.92 1552.51,1326.27 ; 1547.16,1320.92 1557.85,1320.92 ; 1552.51,1326.27 1560.96,1334.72 ; 1552.51,1326.27 1557.85,1320.92 ; 1557.85,1320.92 1562.48,1316.29 ; 1557.85,1320.92 1562.48,1320.92 ; 1560.96,1334.72 1562.48,1333.2 ; 1560.96,1334.72 U1.G5@1565.97,1339.73 1572.29,1346.05 ; 1562.48,1314.14 1562.48,1316.29 ; 1562.48,1314.14 1582.45,1314.14 ; 1562.48,1316.29 1562.48,1320.92 ; 1562.48,1320.92 1572.69,1320.92 ; 1562.48,1320.92 1562.48,1333.2 ; 1562.48,1333.2 1572.69,1322.99 ; 1572.29,1346.05 1572.69,1346.45 ; 1572.29,1346.05 1572.29,1325.13 1572.69,1324.72 ; 1572.69,1320.92 1574.76,1320.92 ; 1572.69,1320.92 1572.69,1322.99 ; 1572.69,1322.99 1572.69,1324.72 ; 1572.69,1322.99 1574.76,1320.92 ; 1572.69,1324.72 1576.49,1320.92 ; 1572.69,1324.72 1572.69,1346.45 ; 1572.69,1346.45 1572.69,1372.04 ; 1572.69,1372.04 v1(1578.76,1378.12) 1572.69,1384.2 ; 1572.69,1372.04 1572.69,1384.2 ; 1574.76,1320.92 1576.49,1320.92 ; 1576.49,1320.92 1582.45,1314.97 1582.45,1314.14 ; 1582.45,1314.14 U1.E6@1617.15,1314.14
  Top w20: J1.2@1458.9,2229.34 1458.9,2176.28 1486.94,2148.24 FB5.1@1511.55,2148.24 1594.02,2148.24 1619.21,2123.04 1619.21,2103.48 v2@1619.21,2064.19 ; FB12.1@1619.21,1884.65 C79.2@1619.21,1936.49 FB6.1@1619.21,1989.56 C80.2@1619.21,2033.46 C80.2@1619.21,2037.35 ; v2(1642.79,2064.19) v2@1619.21,2064.19 ; v2(1643.23,2037.35) C80.2@1619.21,2037.35 ; C121.1@1828.14,668.93 v2(1828.31,693) ; v2(2435.52,1980.44) 2435.52,2005.38 2471.79,2041.64 2605.81,2041.64 2643.24,2079.08 v2(2643.24,2193.49) ; C80.2@1619.21,2037.35 1619.21,2055.29 v2@1619.21,2064.19
  Bottom w10: v1(109.85,-21.23) 128,-3.07 R11.1@135.65,-2.81 ; v3@280.37,17.16 v3(285.77,17.16) 317.88,49.27 R86.1@317.88,53.31 ; R157.2@563.91,2186.53 v1(585.56,2186.53) ; U25.1@896.15,1874.3 918.73,1874.3 930.66,1886.23 930.66,1934.83 916.39,1949.1 U25.3@896.15,1949.1 ; C5.2@1270.98,1290.95 1272.22,1292.19 1288.11,1292.19 v1(1297.27,1301.35) ; C73.2@1347.32,896.04 1347.32,916.36 v1(1348.45,917.49) ; C10.2@1399.63,896.04 v1(1399.63,917.49) ; C3.2@1450.45,844.68 1450.45,865.94 v1(1450.81,866.31) ; v1(1450.81,891.9) v1(1476.4,891.9) 1502.81,891.9 ; C7.2@1502.81,880.87 1502.81,891.9 ; v1(1527.58,891.9) 1502.81,891.9 ; v1(1578.76,1352.53) v1(1578.76,1378.12) ; v2(1579.25,2088.06) v2@1579.74,2088.06 ; v2(1579.74,2063.67) v2@1579.74,2064.12 ; v2(1601.56,2075.26) 1610.38,2087.32 v2(1619.24,2055.26) ; C9.2@1607.08,1166.56 v1(1629.94,1173.39) ; C173.1@1626.4,2095.66 1613.46,2108.6 C172.1@1579.74,2108.6 v2@1579.74,2088.06 ; v1(1629.94,1275.76) 1630.12,1275.93 C8.2@1630.12,1301.42 1630.12,1326.77 v1(1629.94,1326.94) ; C173.1@1640.35,2095.66 1738.78,2095.66 1741.88,2092.56 L12.2@1742.26,2092.18 ; v2(1643.23,2037.35) v2@1640.35,2037.35 ; v1(1655.54,891.9) C4.2@1656.19,869.6 ; v1(1786.32,1360.92) R85.1@1801.01,1346.24 ; FB1.1@2053.53,2253.91 2054.65,2255.03 R28.1@2054.65,2371.5 ; 1261.11,917.49 v1(1271.68,917.49) 1271.68,904.76 ; 1261.11,917.49 1256.37,917.49 1248.46,909.58 C56.2@1248.46,906.98 1256.59,906.98 v1(1271.68,891.9) 1271.68,904.76 ; 1261.11,917.49 1261.11,915.33 1271.68,904.76 ; v2@1579.74,2064.12 v2@1579.74,2088.06 ; v2@1579.74,2064.12 v2(1619.24,2055.26) ; v2@1579.74,2088.06 1610.38,2088.06 v2@1640.35,2037.35 ; C6.2@1605.41,1076.05 1609.68,1077.82 C6.2@1612.2,1078.87 ; C6.2@1605.41,1076.05 1609.68,1074.63 1612.2,1073.78 1612.93,1073.54 1614.86,1072.9 1619.83,1071.24 ; C6.2@1605.41,1076.05 1609.68,1082.85 C6.2@1612.93,1079.6 ; C6.2@1612.2,1078.87 C6.2@1612.93,1079.6 ; C6.2@1612.2,1078.87 1619.83,1071.24 ; C6.2@1612.93,1079.6 C6.2@1614.86,1081.53 ; C6.2@1614.86,1081.53 1622.78,1089.45 ; C6.2@1614.86,1081.53 v1@1622.78,1073.61 ; v2(1619.24,2055.26) 1610.38,2037.35 v2@1640.35,2037.35 ; 1619.83,1071.24 1619.83,1071.03 v1@1622.78,1071.03 ; v1@1622.78,1071.03 v1(1629.94,1071.03) v1(1629.94,1096.62) 1622.78,1089.45 ; v1@1622.78,1071.03 v1@1622.78,1073.61 ; v1@1622.78,1073.61 1622.78,1089.45
  Bottom w12: C173.1@1626.4,2095.66 C173.1@1640.35,2095.66 ; v2@1640.35,2037.35 1640.35,2066.39 v2(1642.79,2064.19) ; C169.1@1778.81,2366.74 R149.1@1817.4,2366.74 1849.88,2366.74 1871.48,2345.14 1871.48,2274.44 1892.71,2253.21 C62.2@1910.68,2253.21
  Bottom w15: v1(1578.76,1378.12) 1578.76,1392.08 C2.2@1590.25,1403.56
  Bottom w20: FB4.1@-10.93,859.73 v3(-10.93,884.1) ; v2(811.75,1849.49) 824.58,1849.49 838.18,1863.1 C129.1@838.18,1867.26 ; v2(811.75,1876.73) 828.72,1876.73 C129.1@838.18,1867.26 ; U25.1@896.15,1874.3 845.22,1874.3 C129.1@838.18,1867.26 ; v2(1643.23,2037.35) 1649.72,2030.86 1660.68,2019.9 1849.49,2019.9 1910.68,2081.09 C62.2@1910.68,2253.21 1962.43,2253.21 C63.2@1962.75,2253.53 2020.27,2253.53 U4.1@2020.65,2253.91 FB1.1@2053.53,2253.91 ; U12.8@1828.14,746.58 v2(1828.31,693) ; FB7.1@1944.89,823.25 v2(1944.89,843.84) v2(1944.89,871.61) ; FB9.1@2435.52,1825.43 v2(2435.52,1953.21) v2(2435.52,1980.44) R30.1@2435.52,2007.55 ; v2(2643.24,2193.49) FB10.1@2662.98,2193.49
  Bottom w25: R131.1@1058.47,1745.44 v2(1058.47,1723.46) C147.2@1058.47,1709.43 ; U17.1@1105.53,1691.54 1078.12,1691.54 ; v2@1058.47,1689.05 v2(1058.47,1682.26) 1062.28,1682.26 1071.57,1691.54 ; v2@1058.47,1689.05 C147.2@1058.47,1704.63 ; v2@1058.47,1689.05 1060.24,1690.81 C147.2@1060.24,1702.87 ; C147.2@1058.47,1704.63 C147.2@1060.24,1702.87 ; C147.2@1058.47,1704.63 C147.2@1058.47,1709.43 ; C147.2@1058.47,1709.43 C147.2@1060.24,1709.43 ; C147.2@1060.24,1702.87 1071.57,1691.54 ; C147.2@1060.24,1702.87 C147.2@1060.24,1709.43 ; C147.2@1060.24,1709.43 1078.12,1691.54 ; 1071.57,1691.54 1078.12,1691.54
VDDIO_SR: C64.2 C65.2 FB1.2 R6.2 R7.2 U1.N5 U1.P5 U4.5 | length 1652.1
  Top w10: U1.P5@1386.84,1339.73 v1(1399.37,1347.47) U1.N5@1412.43,1339.73
  Bottom w10: 2094.01,2188.16 2264.08,2188.16 R7.2@2300.45,2188.16 ; R6.2@2264.08,2192.38 R7.2@2300.45,2188.16 ; R7.2@2301.39,2192.38 R7.2@2300.45,2188.16
  Bottom w15: v1(1399.37,1347.47) 1422.44,1370.54 1422.44,1594.71 1552.75,1725.02 1803.73,1725.02 2089.9,2011.19 2089.9,2159.39 C64.2@2093.52,2163.01 2094.01,2163.5 2094.01,2188.16 C65.2@2094.01,2210.56 2094.01,2253.43 FB1.2@2093.53,2253.91
  Bottom w20: FB1.2@2093.53,2253.91 U4.5@2126.95,2253.91
VIN_AHD: C52.1 R89.2 | length 3845.6
  Top w8: v1(755.83,389.9) 757.1,388.63 R89.2@757.1,346.78
  L4 SIG w8: v1(755.83,389.9) 682.35,389.9 550.74,258.28 144.51,258.28 63.61,339.18 63.61,2152.97 145.61,2234.97 442.76,2234.97 641.68,2036.04 1072.9,2036.04 v1(1113.27,1995.67)
  Bottom w8: v1(1113.27,1995.67) 1137.55,1995.67 C52.1@1138.16,1995.06
VLED+: C97.1 C100.2 D1.2 J13.1 R45.2 U8.5 | length 1278.9
  Bottom w15: J13.1@2027.56,1699.8 2082.16,1699.8 2095.39,1713.02
  Bottom w20: 2095.39,1713.02 2575.24,1713.02 ; D1.2@2788.82,2014.77 2629.15,2014.77 2590.11,1975.72 2590.11,1728.66 2590.88,1728.66 ; U8.5@2794.07,1713.02 C100.2@2709.83,1713.02 2685.05,1713.02 C97.1@2659.8,1713.02 2637.91,1713.02 R45.2@2622.64,1713.02 2607.68,1713.02 2606.51,1713.02 ; 2575.24,1713.02 2590.88,1713.02 2606.51,1713.02 ; 2575.24,1713.02 2590.88,1728.66 ; 2590.88,1728.66 2606.51,1713.02
VLED-: J13.2 R50.2 R54.2 | length 963.1
  Bottom w12: J13.2@2027.56,1680.11 2099.86,1680.11
  Bottom w20: 2099.86,1680.11 2555.53,1680.11 2586.17,1649.47 2586.17,1580.02 2615.27,1550.92 R54.2@2786.26,1550.92 R50.2@2896.43,1550.92
VMICBIAS: C109.2 C110.2 R60.2 R61.1 | length 123.8
  Top w7: R61.1@176.74,588.09 C109.2@215.18,588.09 C110.2@257.39,588.09 R60.2@300.56,588.09
VOML_LINE0: C113.1 U1.T25 | length 2518.4
  Top w7: v1(1335.66,802.16) U1.T25@1335.66,827.92
  L4 SIG w7: v1(232.48,1797.49) 138.31,1703.32 138.31,752.94 342.18,549.07 1027.79,549.07 1280.89,802.16 v1(1335.66,802.16)
  Bottom w7: v1(232.48,1797.49) C113.1@232.48,1819.96
VOPL_LINE0: C112.1 U1.T24 | length 2570.9
  Top w7: U1.T24@1335.66,853.51 1348.4,840.77 1348.4,816.58 v1(1357.89,807.09)
  L4 SIG w7: v1(272.44,1797.33) 253.94,1778.83 237.61,1778.83 155.17,1696.39 155.17,760.24 352.86,562.56 1017.18,562.56 1275.64,821.02 1343.96,821.02 v1(1357.89,807.09)
  Bottom w7: v1(272.44,1797.33) C112.1@272.44,1819.96
VREF: C123.2 C143.2 C200.2 C278.2 C282.2 R46.1 R47.2 U13.H1 U13.M8 U30.H1 U30.M8 | length 2826.8
  Top w15: v1(488.8,703.04) U30.M8@504.55,687.29 ; U13.M8@504.55,1332.96 v1(520.29,1317.22) ; v3(579.12,1621.54) 618.72,1581.95 ; U30.H1@630.53,907.77 v1(646.28,892.02) ; 618.72,1581.95 cw(c590.21,1553.44) 620.32,1580.25 ; 618.72,1581.95 cw(c590.21,1553.44) 620.32,1580.25 ; 618.72,1581.95 cw(c590.21,1553.44) 620.32,1580.25 ; 618.72,1581.95 cw(c590.21,1553.44) 620.32,1580.25 ; 618.72,1581.95 cw(c590.21,1553.44) 620.32,1580.25 ; 618.72,1581.95 cw(c590.21,1553.44) 620.32,1580.25 ; 618.72,1581.95 cw(c590.21,1553.44) 620.32,1580.25 ; 618.72,1581.95 cw(c590.21,1553.44) 620.32,1580.25 ; 618.72,1581.95 cw(c590.21,1553.44) 620.32,1580.25 ; 620.32,1580.25 cw(c590.2,1553.44) U13.H1@630.53,1553.44 ; 620.32,1580.25 cw(c590.2,1553.44) U13.H1@630.53,1553.44 ; 620.32,1580.25 cw(c590.2,1553.44) U13.H1@630.53,1553.44 ; 620.32,1580.25 cw(c590.2,1553.44) U13.H1@630.53,1553.44 ; 620.32,1580.25 cw(c590.2,1553.44) U13.H1@630.53,1553.44 ; 620.32,1580.25 cw(c590.2,1553.44) U13.H1@630.53,1553.44 ; 620.32,1580.25 cw(c590.2,1553.44) U13.H1@630.53,1553.44 ; 620.32,1580.25 cw(c590.2,1553.44) U13.H1@630.53,1553.44 ; 620.32,1580.25 cw(c590.2,1553.44) U13.H1@630.53,1553.44
  L4 SIG w15: 590.77,836.51 592.28,838.02 ; 622.18,867.92 v1(646.28,892.02)
  L4 SIG w18: v1(520.29,1317.22) 498.65,1317.22 ; v3(579.12,1621.54) 578.92,1621.34 529.64,1621.34 480.54,1572.25 480.54,1338.01 ; 590.77,836.51 492.07,836.51 ; 592.28,838.02 622.18,867.92 ; 454.69,836.51 473.91,836.51 ; 454.69,836.51 303.08,836.51 220.14,919.46 220.14,1180.55 356.81,1317.22 458.69,1317.22 ; 454.69,836.51 472.85,818.36 473.91,818.36 ; 458.69,1317.22 474.53,1333.06 479.47,1338.01 480.54,1338.01 ; 458.69,1317.22 474.53,1317.22 ; 473.91,738.97 ccw(c524.73,738.97) v1(488.8,703.04) ; 473.91,738.97 ccw(c524.73,738.97) v1(488.8,703.04) ; 473.91,738.97 ccw(c524.73,738.97) v1(488.8,703.04) ; 473.91,738.97 ccw(c524.73,738.97) v1(488.8,703.04) ; 473.91,738.97 ccw(c524.73,738.97) v1(488.8,703.04) ; 473.91,738.97 ccw(c524.73,738.97) v1(488.8,703.04) ; 473.91,738.97 ccw(c524.73,738.97) v1(488.8,703.04) ; 473.91,738.97 ccw(c524.73,738.97) v1(488.8,703.04) ; 473.91,738.97 ccw(c524.73,738.97) v1(488.8,703.04) ; 473.91,738.97 ccw(c524.73,738.97) v1(488.8,703.04) ; 473.91,738.97 ccw(c524.73,738.97) v1(488.8,703.04) ; 473.91,738.97 ccw(c524.73,738.97) v1(488.8,703.04) ; 473.91,738.97 ccw(c524.73,738.97) v1(488.8,703.04) ; 473.91,738.97 473.91,818.36 ; 473.91,818.36 492.07,836.51 ; 473.91,818.36 473.91,836.51 ; 473.91,836.51 492.07,836.51 ; 474.53,1317.22 480.54,1317.22 498.65,1317.22 ; 474.53,1317.22 480.54,1323.23 480.54,1335.32 ; 480.54,1335.32 480.54,1338.01 ; 480.54,1335.32 498.65,1317.22
  Bottom w15: C282.2@481.74,687.22 484.42,698.67 v1(488.8,703.04)
  Bottom w18: C123.2@505.25,1326.65 510.86,1326.65 v1(520.29,1317.22) ; R46.1@529.63,1598.93 R47.2@529.63,1647.19 C200.2@579.12,1647.19 ; C143.2@579.12,1598.93 v3(579.12,1621.54) C200.2@579.12,1647.19 ; C200.2@592.5,1647.19 C200.2@579.12,1647.19 ; C278.2@630.23,882.68 636.94,882.68 v1(646.28,892.02)
VREF_CPU: C40.2 C41.1 C42.1 R10.1 R12.2 U1.AB22 | length 342.6
  Top w10: U1.AB22@1182.11,904.69 v1(1191.95,915.27)
  Bottom w5: C42.1@1147.85,786.61 1158.12,805.59 1157.5,806.21
  Bottom w15: C40.2@1109.41,751.1 1109.41,715.71 R10.1@1109.47,715.65 R12.2@1147.85,715.65 C41.1@1147.85,751.1 1147.85,796.56 1157.5,806.21 1208.75,857.45 1208.75,898.47 v1(1191.95,915.27)
WE#: U1.AD12 U13.L3 U30.L3 | length 2078.9
  Top w4.2: v1(289.59,1199.63) 289.1,1199.63 289.1,1325.87 cw(c380.64,1325.87) 315.91,1390.6 320.09,1394.78 cw(c365.36,1349.51) 365.36,1413.53 ccw(c365.36,1639.9) 525.43,1479.83 U13.L3@536.04,1490.44 ; v1(520.29,860.52) U30.L3@536.04,844.78 ; v1(1117.92,1173.61) U1.AD12@1130.93,1160.6
  L4 SIG w4.2: v1(1117.92,1173.61) 725.96,1173.61 ; 414.58,1147.86 ccw(c289.59,1022.87) v1(289.59,1199.63) cw(c289.59,1022.87) 414.58,1147.86 ; 414.58,1147.86 424.53,1137.91 ; 424.53,1137.91 ccw(c457.23,1170.61) 457.23,1124.37 ; 424.53,1137.91 ccw(c457.23,1170.61) 457.23,1124.37 ; 457.23,1124.37 611.06,1124.37 ; 611.06,1124.37 ccw(c611.06,1225.13) 682.3,1153.88 ; 611.06,1124.37 ccw(c611.06,1225.13) 682.3,1153.88 ; 682.3,1153.88 685.11,1156.69 ; 685.11,1156.69 cw(c725.96,1115.83) 725.96,1173.61 ; 685.11,1156.69 cw(c725.96,1115.83) 725.96,1173.61
  Bottom w4.2: v1(289.59,1199.63) 294.19,1199.63 399.92,1093.9 cw(c261.98,955.96) 457.06,955.96 457.06,937.96 ccw(c491.32,937.96) 467.09,913.72 v1(520.29,860.52)
XTAL_IN_MPLL: R4.2 U1.H25 | length 50.9
  Top w5: U1.H25@1540.38,827.92 1540.38,815.31 v1(1547.56,808.12)
  Bottom w5: v1(1547.56,808.12) 1550.28,810.84 1573.19,810.84 R4.2@1574.16,811.81
ZQ0: R59.2 U30.L8 | length 56.5
  Top w10: v1(520.29,671.55) U30.L8@536.04,687.29
  Bottom w10: v1(520.29,671.55) 520.29,662.29 R59.2@537.92,644.66
ZQ1: R288.2 U13.L8 | length 165.2
  Top w4.2: v1(507.62,1432.03) 520.26,1419.39 520.26,1348.74 U13.L8@536.04,1332.96
  Bottom w4.2: R288.2@485.11,1477.04 507.62,1454.53 v1(507.62,1432.03)
pads on no net: CN1.14 CN1.15 J5.6 J8.2 J8.3 J9.4 KEY1.5 KEY1.6 KEY2.5 KEY2.6 KEY3.5 KEY3.6 KEY4.5 KEY4.6 KEY5.5 KEY5.6 M1.1 M2.1 M3.1 M4.1 U1.A2 U1.A3 U1.A4 U1.A5 U1.A6 U1.A7 U1.A8 U1.A10 U1.A11 U1.A20 U1.A21 U1.A22 U1.A23 U1.A24 U1.AA2 U1.AA3 U1.AA22 U1.AA24 U1.AC1 U1.B1 U1.B2 U1.B3 U1.B4 U1.B5 U1.B6 U1.B7 U1.B8 U1.B10 U1.B11 U1.B15 U1.B16 U1.B20 U1.B21 U1.B22 U1.B23 U1.B24 U1.C1 U1.C2 U1.C3 U1.C6 U1.C7 U1.C14 U1.D1 U1.D2 U1.D6 U1.D7 U1.E1 U1.E2 U1.E22 U1.E23 U1.F1 U1.F2 U1.F3 U1.F22 U1.F23 U1.G1 U1.G2 U1.G22 U1.G23 U1.H22 U1.K2 U1.K3 U1.K4 U1.P24 U1.P25 U1.R24 U1.R25 U1.W24 U1.W25 U4.4 U7.4 U10.3 U10.7 U11.5 U11.10 U13.J1 U13.J9 U13.L1 U13.L9 U14.6 U17.4 U23.6 U23.17 U23.18 U23.20 U23.34 U23.35 U23.37 U23.38 U30.J1 U30.J9 U30.L1 U30.L9

## Polygon pours and split planes (outlines as drawn)
GND on L2 GND "L2 GND-GND" (solid, remove dead copper, pour order 0): -107.6,2517.13 2992.78,2517.13 2992.78,-129.31 -107.6,-129.31
DVDD_DDR on L4 SIG "L4 SIG-DVDD_DDR" (solid, remove dead copper, pour order 14): 971.56,2016.4 1066.6,2016.4 1165.38,1917.61 1165.38,1696.28 1357.32,1504.34 1357.32,1308.64 1646.8,1308.64 1646.8,885.99 1191.64,885.99 1191.64,1318.65 971.56,1538.73
GND on L4 SIG "L4 SIG-GND 1" (solid, remove dead copper, pour order 4): -121.9,2538.21 2986.37,2538.21 2986.37,-127.26 -121.9,-127.26
GND on L4 SIG "L4 SIG-GND" (solid, remove dead copper, pour order 8): 1288.27,1279.91 1509.13,1279.91 1535.02,1254.02 1535.02,992.07 1528.63,985.67 1369.53,985.67 1288.27,1066.94
GND on l3 POWER "l3 POWER-GND" (solid, remove dead copper, pour order 22): 1319.26,1282.47 1507.58,1282.47 1535.89,1254.16 1535.89,994.59 1526.92,985.62 1373.61,985.62 1319.28,1039.94 1319.26,1039.94
VDD15 on l3 POWER "l3 POWER-VDD15" (solid, remove dead copper, pour order 20): 610.47,2066.14 778.56,2066.14 778.56,1761.5 961.97,1761.5 1228.19,1495.28 1228.19,1261.63 1171,1261.63 1171,1154.52 1256.02,1154.51 1256.02,800.84 1048.19,593 387.57,593 207.83,772.74 207.83,1487.14 488.14,1767.45 488.14,2066.14 610.47,2066.14
VBUS on l3 POWER "l3 POWER-VBUS" (solid, remove dead copper, pour order 12): -102.27,2521.4 2987.04,2521.4 2987.04,-109.87 497.05,-109.87 497.05,452.81 1981.85,452.81 1981.85,1896.13 2474.58,1896.13 2474.58,2257.53 -112.27,2257.53 -112.27,2521.93 -102.27,2521.93
VDD11 on l3 POWER "l3 POWER-VDD11" (solid, remove dead copper, pour order 10): 1263.23,930.52 1303.19,930.52 1303.19,900.24 1334.37,900.24 1334.37,930.31 1420.48,930.31 1420.48,905.35 1646.56,905.35 1646.56,1036.39 1616.9,1066.05 1616.9,1286.68 1554.71,1348.87 1554.71,1994.32 1458.61,2090.41 1183.19,2090.41 1140.19,2047.4 1140.19,1596.06 1233.85,1502.4 1233.84,1254.82 1178.23,1254.82 1178.23,1160.49 1263.23,1160.49
VDDIO33 on l3 POWER "l3 POWER-VDDIO33" (solid, remove dead copper, pour order 6): -110.39,2520.34 2994.03,2520.34 2994.03,-126.4 -110.39,-126.4
GND on L5 GND "L5 GND-GND" (solid, remove dead copper, pour order 18): -107.64,2516.67 2994.03,2516.67 2994.03,-135.16 -107.64,-135.16
GND on Bottom "Bottom-GND" (solid, remove dead copper, pour order 2): -107.64,2518.05 2995.27,2518.05 2995.27,-130.84 -107.64,-130.84
GND on Top "Top-GND" (solid, remove dead copper, pour order 16): -109.93,2516.21 2997.8,2516.21 2997.8,-122.6 -109.93,-122.6

## Keep-outs
Top:
  region: 1007.39,645.9 965.65,604.17 364.93,604.17 309.49,659.6 309.49,1506.47 387.14,1584.11 881.92,1584.11 1210.86,1255.17 1210.86,889.24 1012.35,690.72 1007.39,690.72 1007.39,645.9
  region: 2319.2,264.2 2526.61,264.2 2526.61,219.75 2319.2,219.75 2319.2,264.2
l3 POWER:
  region: 451.35,967.49 ccw(c423.72,967.49) 423.72,995.12 ccw(c423.72,967.49) 396.1,967.49 ccw(c423.72,967.49) 423.72,939.87 ccw(c423.72,967.49)
L4 SIG:
  region: 919.22,903.76 647.83,903.76 583.7,839.63 357.55,839.63 357.55,1307.46 1102.84,1307.46 1211.53,1198.77 1211.53,1045.53 919.22,1045.53 919.22,903.76
  region: -53.21,2146.15 -0.23,2146.15 -0.23,287.62 -53.21,287.62 -53.21,2146.15
Bottom:
  region: 1177.61,889.71 955.07,667.18 488.96,667.18 274.14,882 274.14,1377 412.19,1515.05 1177.61,1515.05 1177.61,889.71
  region: 606.98,1521.32 560.59,1521.32 560.59,1548.2 606.98,1548.2 606.98,1521.32
Keep-Out Layer:
  lines w5: -45.28,0 45.28,0 ; -45.28,2401.57 45.28,2401.57 ; 86.61,137.8 267.72,137.8 ; 95.62,2500 -19.69,2500 ccw(c-19.69,2421.26) -98.43,2421.26 -98.43,-19.69 ccw(c-19.69,-19.69) -19.69,-98.43 503.94,-98.43 503.94,-21.65 559.06,-21.65 559.06,-98.43 730.31,-98.43 730.31,112.2 690.94,112.2 690.94,169.29 730.31,169.29 730.31,271.65 962.6,271.65 962.6,55.12 1001.97,55.12 1001.97,5.91 962.6,5.91 962.6,-98.43 1311.02,-98.43 1311.02,157.48 1287.4,157.48 1287.4,236.22 1311.02,236.22 1311.02,354.33 1562.99,354.33 1562.99,196.85 1586.61,196.85 1586.61,118.11 1562.99,118.11 1562.99,-98.43 1881.89,-98.43 1881.89,78.74 2173.23,78.74 2173.23,-98.43 2314.96,-98.43 2314.96,-21.65 2370.08,-21.65 2370.08,-98.43 2893.7,-98.43 ccw(c2893.7,-19.69) 2972.44,-19.69 2972.44,251.97 2322.83,251.97 2322.83,1472.44 2972.44,1472.44 2972.44,2421.26 ccw(c2893.7,2421.26) 2893.7,2500 2778.39,2500 ; 95.64,2500.04 ccw(c177.17,2460.63) 258.76,2499.9 ; 258.71,2500 2615.31,2500 ; 2606.3,137.8 2787.4,137.8 ; 2615.33,2500.04 ccw(c2696.85,2460.63) 2778.44,2499.9 ; 2828.74,0 2919.29,0 ; 2828.74,2401.57 2919.29,2401.57

## Other copper
Top:
  region net VBAT: 2166.9,489.93 2183.13,506.17 2267.07,506.17 2304.24,468.99 2304.24,244.8 2337.89,211.16 2518.29,211.16 2526.34,203.1 2526.34,149.65 2510.49,133.79 2303.97,133.79 2213.56,224.2 2213.56,367.92 2179.64,401.84 2166.9,414.59 2166.9,489.9 2166.9,489.93
  region net DVDD_DDR: 1158.33,2075.83 1158.33,2036.19 1104.02,2036.19 1090.08,2022.25 1090.08,1917.31 1081.99,1909.22 1010.96,1909.22 1001.28,1918.91 1001.28,1998.65 1078.45,2075.83 1158.33,2075.83
  region net GND: 2081.08,178.57 2233.09,178.57 2233.09,93.97 2081.08,93.97 2081.08,178.57
  region net VBAT: 2410.42,211.03 2516.68,211.03 2516.68,-74.72 2410.42,-74.72 2410.42,211.03
  region net VDD11: 1187.36,2077.04 1356.06,2077.04 1356.06,2035.67 1187.36,2035.67 1187.36,2077.04
  region net VBUS: 2530.11,9.15 2669.48,9.15 2669.48,-74.57 2530.11,-74.57 2530.11,9.15
  region net USB_PWR: 1858.13,327.69 1859.3,333.55 1862.61,338.51 1867.57,341.82 1873.43,342.99 1873.43,342.69 1959.45,342.99 1965.31,341.82 1970.27,338.51 1973.58,333.55 1974.75,327.69 1974.45,327.69 1974.75,108.01 1973.58,102.16 1970.27,97.2 1965.31,93.88 1959.45,92.72 1959.45,93.01 1930.7,92.72 1924.85,93.88 1919.89,97.2 1916.57,102.16 1915.41,108.01 1915.7,108.01 1916,174.12 1914.83,179.97 1911.52,184.93 1911.31,184.72 1862.61,233.01 1859.3,237.97 1858.13,243.82 1858.43,243.82 1858.43,327.69